# Altium PCB biolab_rev2.PcbDoc
Units mil, origin at the board's own origin, x right, y up, seen from the top; angles counter-clockwise.
Board outline 5981.63 x 5578.37 mil, 2 copper layers (Top Layer, Bottom Layer); 39 components, 34 nets, 157 pads, 4 vias.
Unrouted connection lines stored in the file: 109.
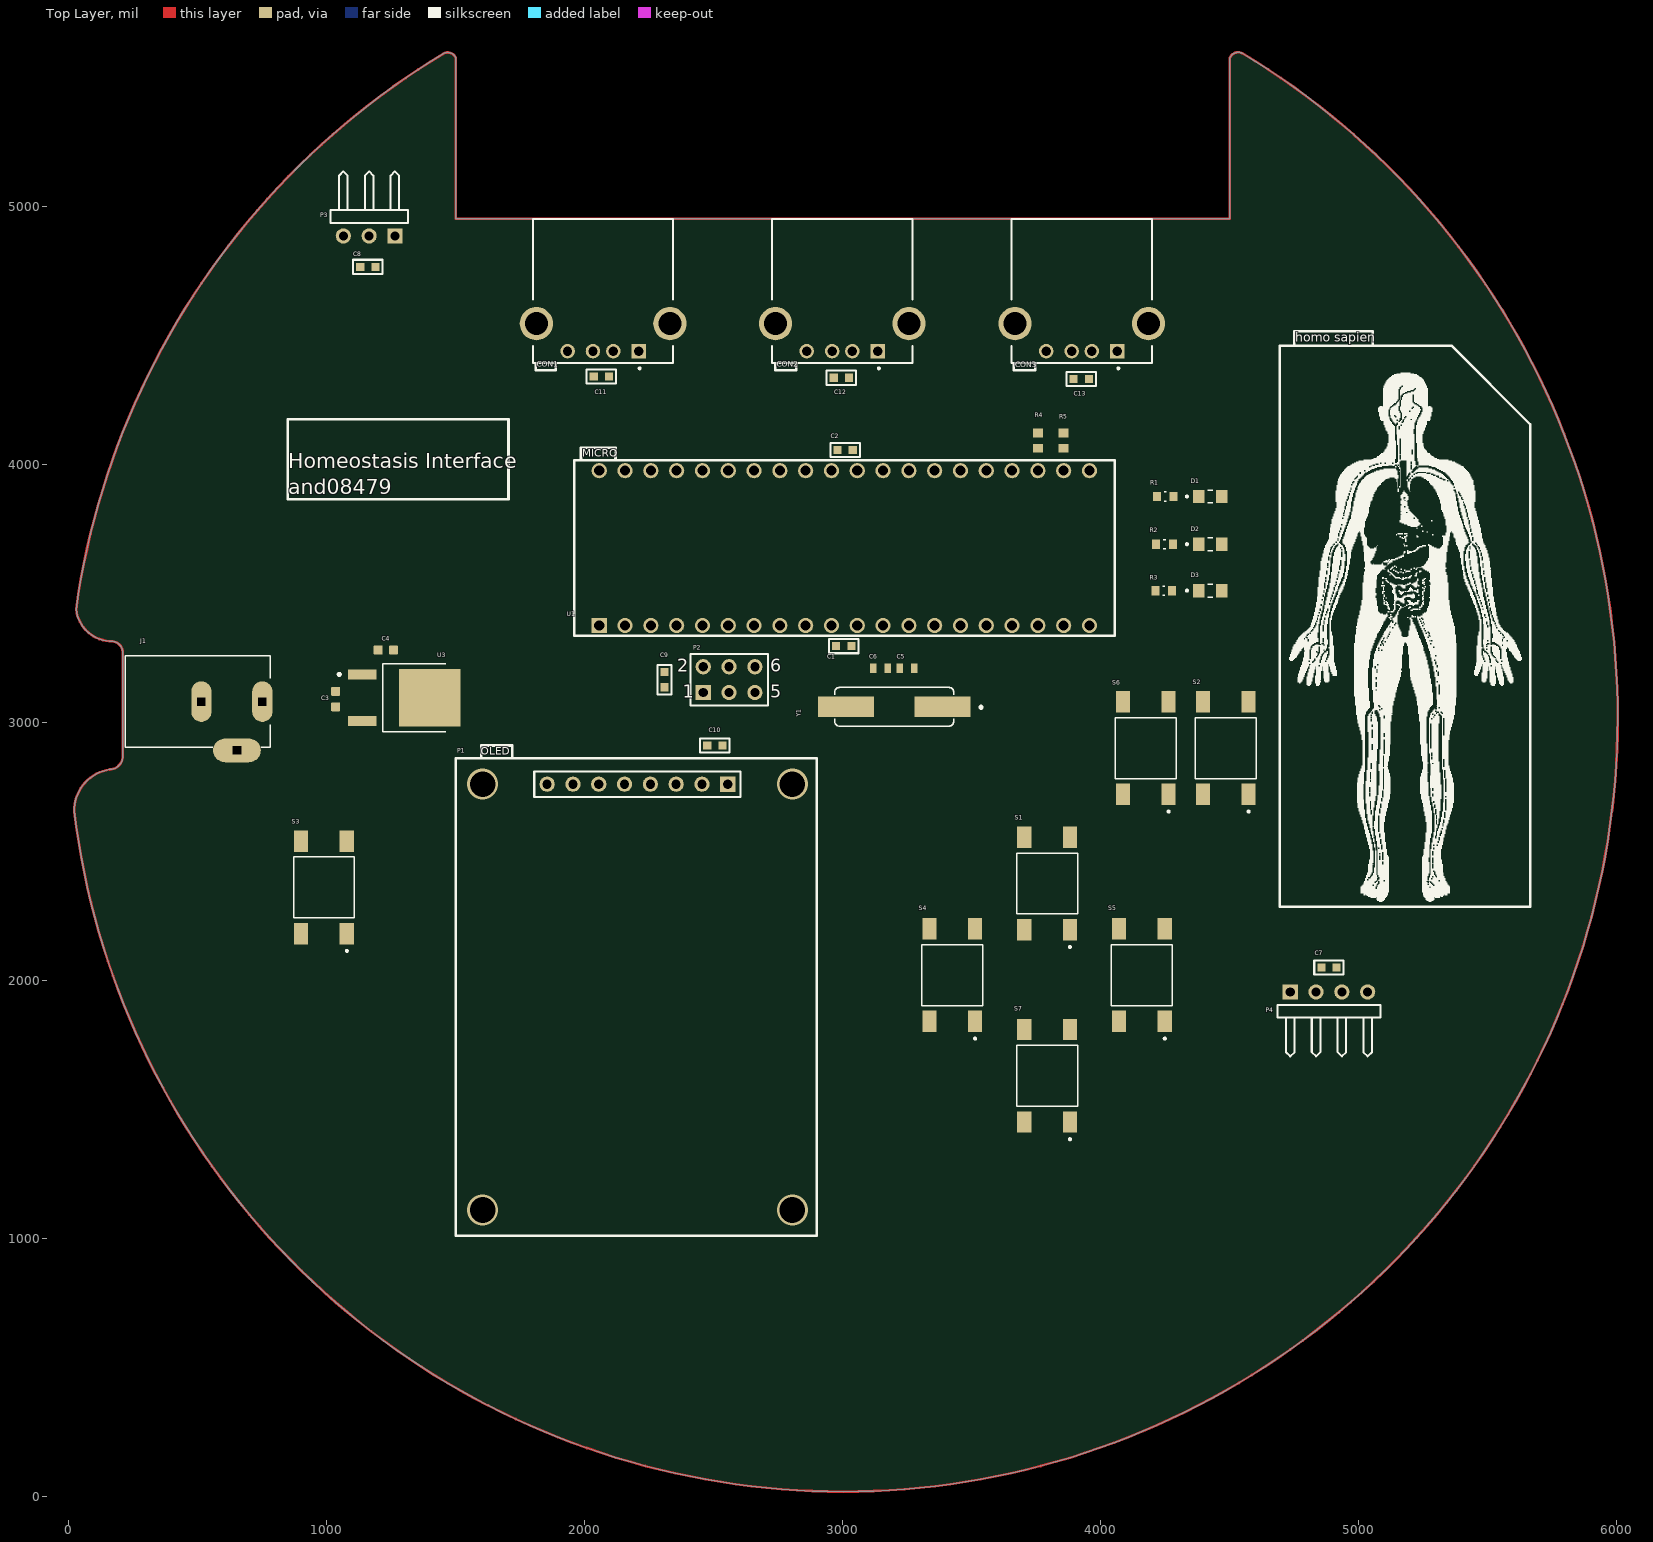
[diagram p0: Top Layer view]
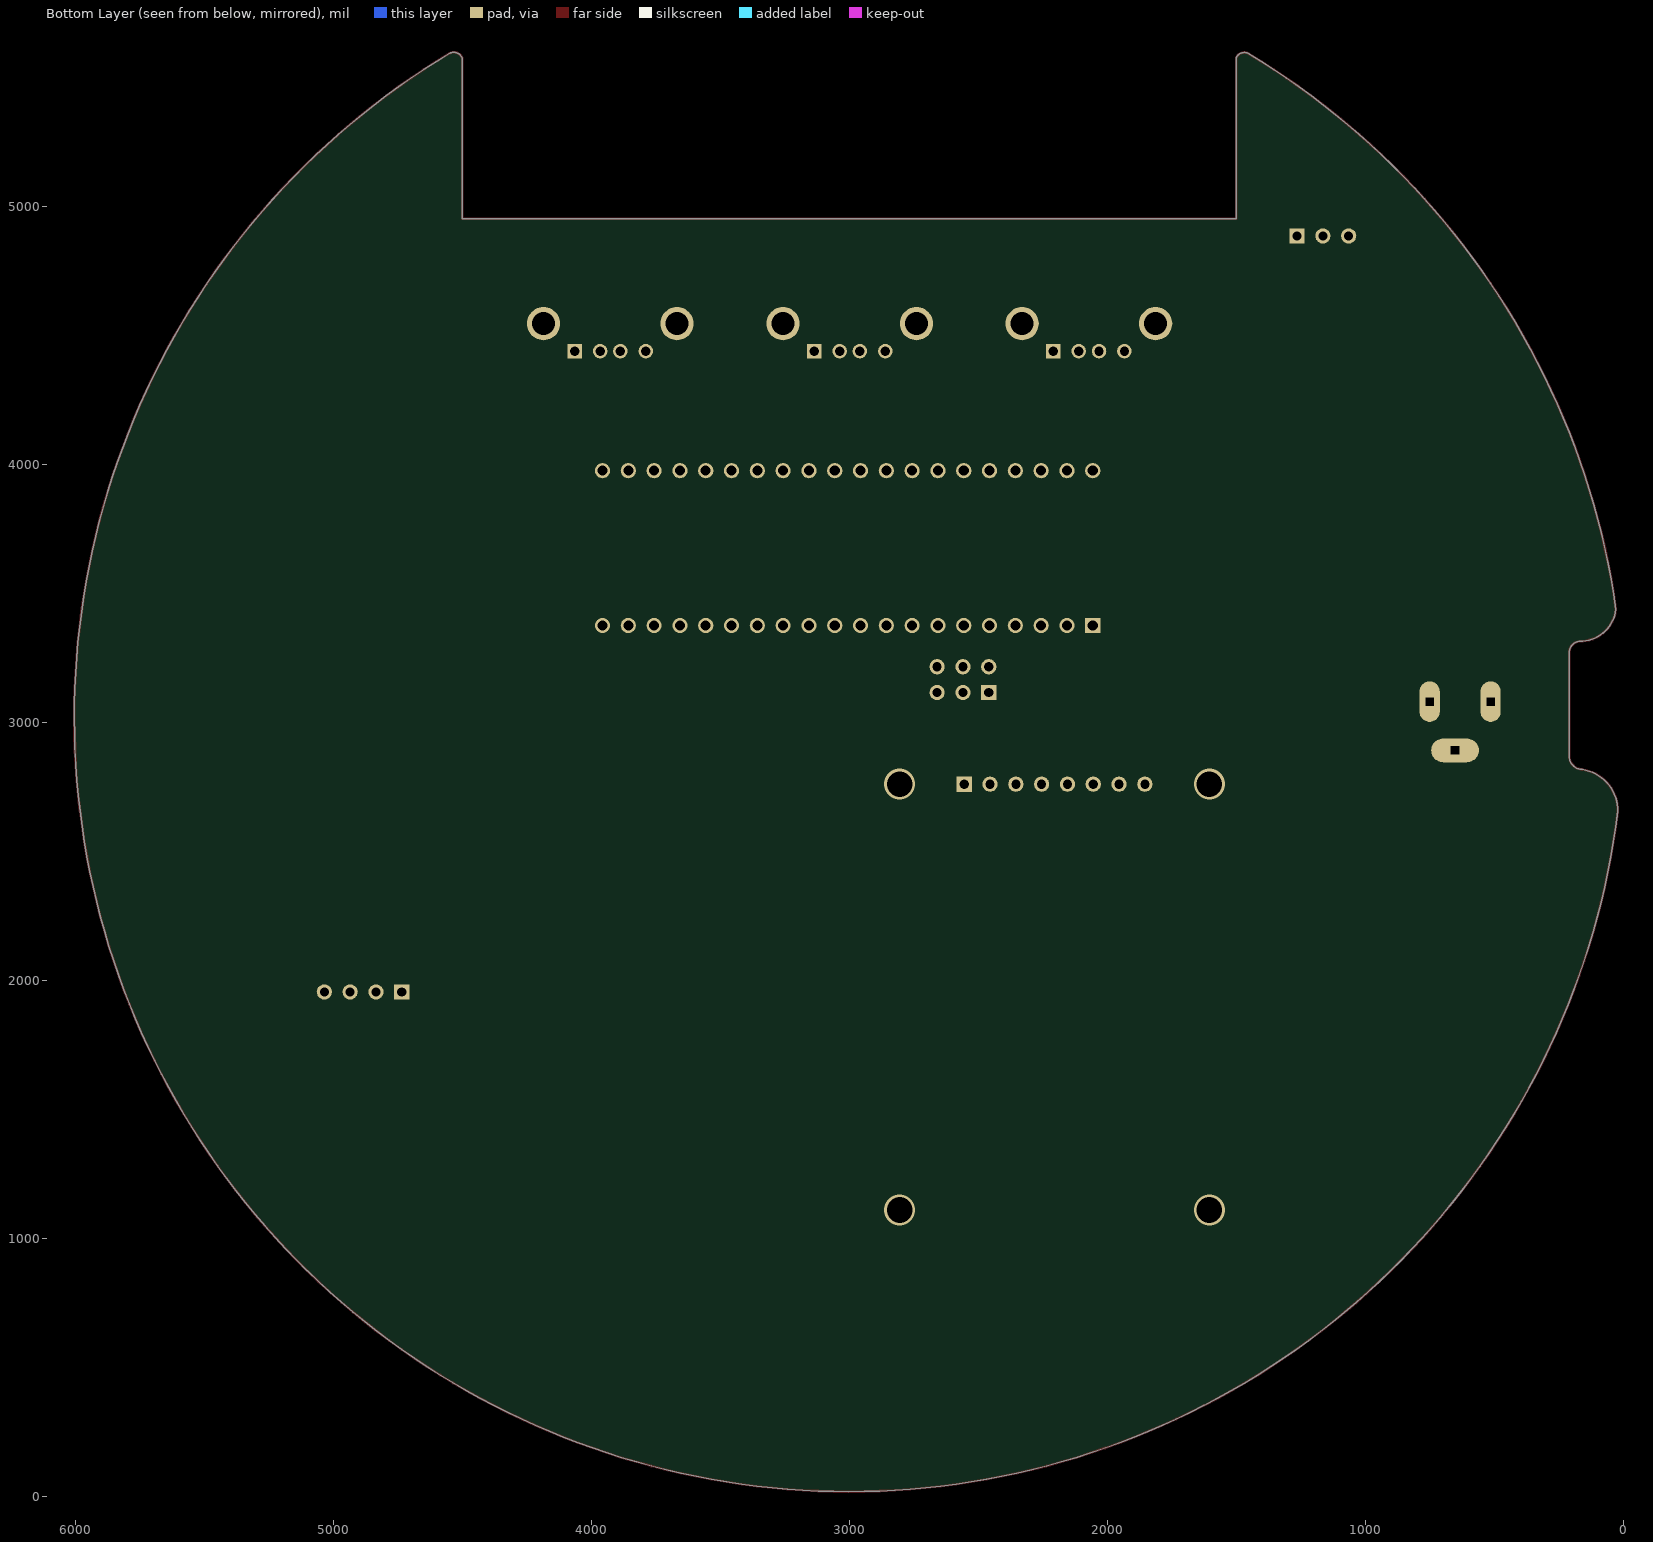
[diagram p1: Bottom Layer view, seen from below]

## Layer stack, top to bottom
Top Solder: solder mask 0.4, Solder Resist, Dk 3.5
Top Layer: signal copper 1.4
Dielectric 1: dielectric 12.6, FR-4, Dk 4.8
Bottom Layer: signal copper 1.4
Bottom Solder: solder mask 0.4, Solder Resist, Dk 3.5

## Board outline
22.38,2654.16 cw(c182.92,2658.15) 159.7,2817.06 ccw(c158.38,2868.68) 210,2870 210,3265 ccw(c165.42,3269.43) 169.85,3314.02 cw(c168.37,3454.15) 29.21,3437.52 cw(c3001.87,3019.74) 1455.91,5592.91 1455.79,5593.11 cw(c1469.31,5561.48) 1500.94,5575 1500.94,4950.94 4500.94,4950.94 4500.94,5575 cw(c4533.81,5560.72) 4548.09,5593.6 cw(c3001.87,3020.26) 3001.87,18.13 cw(c3001.87,3020)

## Design rules (kind name [scope] priority, off if disabled: settings)
Clearance [All] p1: gap=10 ignorepadtopadclearanceinfootprint=FALSE except(0: Arc-Hole Track-Hole SMDPad-Hole THPad-Hole Via-Hole Fill-Hole Poly-Hole Region-Hole Text-Hole)
PolygonConnect [All] p1: connectstyle=Relief reliefconductorwidth=10 reliefentries=4 polygonreliefangle="90 Angle" airgapwidth=10
RoutingVias [All] p1: holewidth=28 width=50 viastyle="Through Hole" minholewidth=28 minwidth=50 maxholewidth=28 maxwidth=50
SolderMaskExpansion [All] p1: expansion=4 istentingtop=FALSE
Width [All] p1: maxlimit=10 minlimit=10 preferedwidth=10
30 further rules are at their usual default settings.

## Components (designator, comment, footprint, x,y, rotation, side; value= is the part's Value field where it differs from the comment)
C1 "100nF" WCAP-CSST_885382206004 3004.53,3295 r180 top
C2 "100nF" WCAP-CSST_885382206004 3010,4055 r0 top
C3 "10uF" C0603 1035,3090 r0 top
C4 "10uF" C0603 1230,3280 r90 top
C5 "20pF" CAPC1608X85N 3250,3210 r0 top
C6 "20pF" CAPC1608X85N 3147,3210 r180 top
C7 "100nF" WCAP-CSST_885382206004 4885,2050 r0 top
C8 "100nF" WCAP-CSST_885382206004 1160,4765 r180 top
C9 "100nF" WCAP-CSST_885382206004 2310,3165 r90 top
C10 "100nF" WCAP-CSST_885382206004 2505,2910 r180 top
C11 "100nF" WCAP-CSST_885382206004 2065,4340 r0 top
C12 "100nF" WCAP-CSST_885382206004 2995,4335 r0 top
C13 "100nF" WCAP-CSST_885382206004 3925,4330 r0 top
CON1 "USB" GCT_USB1130-15-A_REVA 2071.87,4545 r180 top
CON2 "USB" GCT_USB1130-15-A_REVA 2998.63,4545 r180 top
CON3 "USB" GCT_USB1130-15-A_REVA 3926.87,4545 r180 top
D1 "POWER" LED_7012X1 4425,3875 r0 top
D2 "INIT" LED_7012X1 4425,3690 r0 top
D3 "RUN" LED_7012X1 4425,3510 r0 top
J1 "PWR IN" NINIGI_DC-005 652.8,3080 r0 top
P1 "OLED" HDR1X8 2555,2760 r180 top locked
P2 "ISP" HDR2X3 2460,3115 r0 top
P3 "STRIP" HDR1X3H 1265,4885 r180 top
P4 "I2C" HDR1X4H 4735,1955 r0 top
R1 "200" RESC1608X55N 4250,3875 r0 top
R2 "200" RESC1608X55N 4247.72,3690 r0 top
R3 "200" RESC1608X55N 4245,3510 r0 top
R4 "1k5" RESC1508X55N 3757.99,4091.35 r90 top
R5 "1k5" RESC1508X55N 3856.77,4091.35 r90 top
S1 "UP" SW_TL3301AF160QG 3792.5,2375 r90 top
S2 "SELECT" SW_TL3301AF160QG 4485,2900 r90 top
S3 "RESET" SW_TL3301AF160QG 990,2360 r90 top
S4 "LEFT" SW_TL3301AF160QG 3425,2020 r90 top
S5 "RIGHT" SW_TL3301AF160QG 4160,2020 r90 top
S6 "BACK" SW_TL3301AF160QG 4175,2900 r90 top
S7 "DOWN" SW_TL3301AF160QG 3792.5,1630 r90 top
U1 "ATMEGA644PV" DIP254P1524X483-40 3956.87,3975 r90 top
U3 "NCP1117DT50G" DPAK229P990X238-4N 1301.18,3095 r270 top
Y1 "16 MHz" XTAL_FOXSDLF/160-20 3200,3060 r180 top

## Footprints (in the part's own frame and the unit in brackets; to place one, negate y for a bottom-side part, rotate by r counter-clockwise, add the part's x,y. Pads: shape width x height; smd on the part's side, far side on the other; paste and mask are expansions set on the pad)
C0603 [mil]
  rrect25% 35x35 smd: 1(0,30) 2(0,-30)
  body extent -16,-31 16,31, height 35
CAPC1608X85N [mil]
  rect 26x37 smd: 1(-28,0) 2(28,0)
DIP254P1524X483-40 [mil]
  rect 59x59 hole 39: 1(-600,1900)
  round 59 hole 39: 2(-600,1800) 3(-600,1700) 4(-600,1600) 5(-600,1500) 6(-600,1400) 7(-600,1300) 8(-600,1200) 9(-600,1100) 10(-600,1000) 11(-600,900) 12(-600,800) 13(-600,700) 14(-600,600) 15(-600,500) 16(-600,400) 17(-600,300) 18(-600,200) 19(-600,100) 20(-600,0) 21(0,0) 22(0,100) 23(0,200) 24(0,300) 25(0,400) 26(0,500) 27(0,600) 28(0,700) 29(0,800) 30(0,900) 31(0,1000) 32(0,1100) 33(0,1200) 34(0,1300) 35(0,1400) 36(0,1500) 37(0,1600) 38(0,1700) 39(0,1800) 40(0,1900)
  body extent -625,-80 25,1980, height 190
DPAK229P990X238-4N [mm]
  rect 0.97x2.83 smd: 1(-2.29,-4.14) 3(2.29,-4.14)
  rect 5.63x6.09 smd paste-4: 2(0,2.51)
  silkscreen extent -3.37,-6.5 3.37,4.09, body extent -3.25,-4.83 3.25,5.08, height 2.39
GCT_USB1130-15-A_REVA [mm]
  rect 1.428x1.428 hole 0.92: 1(-3.5,2.71)
  round 1.428 hole 0.92: 2(-1,2.71) 3(1,2.71) 4(3.5,2.71)
  round 3.276 hole 2.26: S1(-6.57,0) S2(6.57,0)
  silkscreen extent -6.9,-10.28 6.9,4.5, body extent -7.8,-10.28 7.8,3.88, height 6.99
HDR1X3H [mm] "Connector; Header; 3 Position; Right Angle"
  rect 1.5x1.5 hole 0.9: 1(0,0)
  round 1.5 hole 0.9: 2(2.54,0) 3(5.08,0)
  silkscreen extent -1.27,-6.35 6.35,-1.27
HDR1X4H [mm] "Connector; Header; 4 Position; Right Angle"
  rect 1.5x1.5 hole 0.9: 1(0,0)
  round 1.5 hole 0.9: 2(2.54,0) 3(5.08,0) 4(7.62,0)
  silkscreen extent -1.27,-6.35 8.89,-1.27
HDR1X8 [mm] "Connector; Header; 8 Position"
  rect 1.5x1.5 hole 0.9: 1(0,0)
  round 1.5 hole 0.9: 2(2.54,0) 3(5.08,0) 4(7.62,0) 5(10.16,0) 6(12.7,0) 7(15.24,0) 8(17.78,0)
  silkscreen extent -1.27,-1.27 19.05,1.27
HDR2X3 [mm] "Connector; Header; 3x2 Position"
  rect 1.5x1.5 hole 0.9: 1(0,0)
  round 1.5 hole 0.9: 2(0,2.54) 3(2.54,0) 4(2.54,2.54) 5(5.08,0) 6(5.08,2.54)
  silkscreen extent -1.27,-1.27 6.35,3.81
LED_7012X1 [mm]
  rect 1.15x1.3 smd: A(1.125,0) C(-1.125,0)
  silkscreen extent -2.4,-0.63 0.23,0.63, body extent -1,-0.62 1,0.62, height 0.73
NINIGI_DC-005 [mm]
  oval 4.7x2.35 hole 0.8 square: 2(0,-4.8)
  oval 2x4 hole 0.8 square: 3(-3.5,0) 4(2.5,0)
  silkscreen extent -11,-4.5 3.3,4.5, body extent -11.25,-5.02 3.05,4.38, height 11
RESC1508X55N [mm]
  rect 0.85x0.98 smd: 1(-0.75,0) 2(0.75,0)
  body extent -0.77,-0.43 0.77,0.43, height 0.55
RESC1608X55N [mm]
  rect 0.79x0.93 smd: 1(-0.82,0) 2(0.82,0)
  silkscreen extent -0.11,-0.45 0.11,0.45, body extent -0.8,-0.4 0.8,0.4, height 0.55
SW_TL3301AF160QG [mm]
  rect 2.1x1.4 smd: 1(-4.55,-2.25) 2(4.55,-2.25) 3(-4.55,2.25) 4(4.55,2.25)
  silkscreen extent -6.35,-3 3,3, body extent -5,-3 5,3, height 5.1
WCAP-CSST_885382206004 [mm]
  rect 0.8x0.8 smd: 1(-0.75,0) 2(0.75,0)
  silkscreen extent -1.45,-0.7 1.45,0.7, body extent -0.78,-0.4 0.82,0.4, height 0.4
XTAL_FOXSDLF/160-20 [mm]
  rect 5.5x2 smd: 1(-4.75,0) 2(4.75,0)
  silkscreen extent -8.6,-1.9 5.85,1.9

## Part data
C1 C2 C7 C8 C9 C10 C11 C12 C13: library part 885382206004, "<b> WCAP-CSST Soft Termination MLCC <br> <br> <br><b>Characteristics </b><br> </b><br>Multilayer ceramic chip capacitors <br>Recommended soldering: Reflow <br>Operating temperature: -55 Â°C up to +125 Â°C <br>Capacitance range: 220 pF - 2.2 ÂµF <br>Rated voltage: 16 V(DC) up to 2 kV(DC) <br>Size: 0603, 0805, 1206 and 1210 <br>High absorbtion of mechanical stress   <br> <br> <br><b>Applications </b><br> <br>Application with high mechanical stress <br>Power supply <br>Lighting  <br> <br> <br><a href=\"https://katalog.we-online.de/media/images/v2/Family_WCAP-CSST.jpg\" title=\"Enlarge picture\"> <img src=\"https://katalog.we-online.de/media/images/v2/Family_WCAP-CSST.jpg\" width=\"320\"></a><p> Details see: <a href=\"https://katalog.we-online.de/en/pbs/WCAP-CSST#vs_ct:1\">https://katalog.we-online.de/en/pbs/WCAP-CSST#vs_ct:1<br> <br></a><p>Created By Yingchun,Shan 2018-11-14 <br><br>20178(C) Wurth Elektronik", Package=None, Availability=Unavailable, MF="{'manufacturer': u'Wurth Electronics Inc'}", MP=885382206004, Price=None
C3 C4: library part CERAMIC-10UF-10V-10%-X5R(0603), "302010103", Package=None, Availability=Unavailable, MF="{'manufacturer': u'Yageo'}", MP=CERAMIC-10UF-10V-10%-X5R(0603), Price=None
C5 C6: library part C0603C200J5GACTU, "CAPACITOR, 0603", Package=None, Availability=Unavailable, MF="{'manufacturer': u'KEMET'}", MP=C0603C200J5GACTU, Price=None
CON1 CON2 CON3: library part USB1130-15-A_REVA, Package=None, Availability=Unavailable, MF="{'manufacturer': u'Global Connector Technology'}", MP=USB1130-15-A_REVA, Price=None
D1 D2 D3: library part 7012X1, "Red LED Indication - Discrete 1.7V 0805 (2012 Metric)", Package=None, Availability=Unavailable, MF="{'manufacturer': u'Visual'}", MP=7012X1, Price=None
J1: library part DC-005, "DC Jack", Package=None, Availability=Unavailable, MF="{'manufacturer': u'Best Inc.'}", MP=DC-005, Price=None
P1: library part "Header 8", "Header, 8-Pin", LatestRevisionDate=17-Jul-2002, LatestRevisionNote="Re-released for DXP Platform.", Publisher="Altium Limited"
P2: library part "Header 3X2", "Header, 3-Pin, Dual row", LatestRevisionDate=17-Jul-2002, LatestRevisionNote="Re-released for DXP Platform.", Publisher="Altium Limited"
P3: library part "Header 3H", "Header, 3-Pin, Right Angle", LatestRevisionDate=17-Jul-2002, LatestRevisionNote="Re-released for DXP Platform.", Publisher="Altium Limited"
P4: library part "Header 4H", "Header, 4-Pin, Right Angle", LatestRevisionDate=17-Jul-2002, LatestRevisionNote="Re-released for DXP Platform.", Publisher="Altium Limited"
R1 R2 R3: library part SR0603JR-07200RL, Package=None, Availability=Unavailable, MF="{'manufacturer': u'Yageo'}", MP=SR0603JR-07200RL, Price=None
R4 R5: library part TNPW06031K50BXEN, Package=None, Availability=Unavailable, MF="{'manufacturer': u'Vishay'}", MP=TNPW06031K50BXEN, Price=None
S1 S2 S3 S4 S5 S6 S7: library part TL3301AF160QG, Package=None, Availability=Unavailable, MF="{'manufacturer': u'E-Switch'}", MP=TL3301AF160QG, Price=None
U1: library part ATMEGA644PV-10PU, "8-bit Microcontroller with In-System Programmable  Flash", Package=None, Availability=Unavailable, MF="{'manufacturer': u'Microchip Technology'}", MP=ATMEGA644PV-10PU, Price=None
U3: Package=None, Availability=Unavailable, MF="{'manufacturer': u'ON Semiconductor'}", MP=NCP1117DT50G, Price=None
Y1: library part FOXSDLF/160-20, "Crystal 16MHz 20pF 2-Pin HC-49/SD", Package=None, Availability=Unavailable, MF="{'manufacturer': u'Fox Electronics'}", MP=FOXSDLF/160-20, Price=None

## Via types
v1: diameter 120, hole 100, Top Layer to Bottom Layer, 4 vias

## Nets (pads, with @x,y where several pads share a name; then routed paths per layer and width w, separated by ;. In a path a pad name is that pad's centre, name@x,y a point inside that pad or via, vN(x,y) a via of type N, cw(c..) or ccw(c..) an arc to the next point about the centre after c; other vN are vias at no path point)
+3: P1.3 R4.2 R5.2
+5: C1.2 C2.2 C4.2 C7.2 C8.2 C9.2 C10.2 C11.2 C12.2 C13.2 CON1.1 CON2.1 CON3.1 D1.A D2.A D3.A P1.2 P2.2 P3.3 P4.4 U1.10 U1.30 U1.32 U3.2
+9: C3.2 J1.4 U3.3
BACK: S6.1 S6.2 U1.26
CON1A: CON1.2 U1.40
CON1B: CON1.3 U1.39
CON2A: CON2.2 U1.38
CON2B: CON2.3 U1.37
CON3A: CON3.2 U1.36
CON3B: CON3.3 U1.35
DOWN: S7.1 S7.2 U1.15
GND: C1.1 C2.1 C3.1 C4.1 C5.1 C6.1 C7.1 C8.1 C9.1 C10.1 C11.1 C12.1 C13.1 CON1.4 CON2.4 CON3.4 J1.2 J1.3 P1.1 P2.6 P3.1 P4.1 S1.3 S1.4 S2.3 S2.4 S3.3 S3.4 S4.3 S4.4 S5.3 S5.4 S6.3 S6.4 S7.3 S7.4 U1.11 U1.31 U3.1
INIT_LED: R2.1 U1.19
LEFT: S4.1 S4.2 U1.16
MISO: P2.1 U1.7
MOSI: P1.8 P2.4 U1.6
NetD1_C: D1.C R1.2
NetD2_C: D2.C R2.2
NetD3_C: D3.C R3.2
nRST: P2.5 S3.1 S3.2 U1.9
OLED_CS: P1.4 U1.5
OLED_DC: P1.6 U1.4
OLED_RST: P1.5 U1.3
PWR_LED: R1.1 U1.21
RIGHT: S5.1 S5.2 U1.17
RUN_LED: R3.1 U1.20
SCK: P1.7 P2.3 U1.8
SCL: P4.2 R5.1 U1.22
SDA: P4.3 R4.1 U1.23
SEL: S2.1 S2.2 U1.27
STRIP_SIG: P3.2 U1.1
UP: S1.1 S1.2 U1.14
XTAL_IN: C5.2 U1.13 Y1.1
XTAL_OUT: C6.2 U1.12 Y1.2
pads on no net: CON1.S1 CON1.S2 CON2.S1 CON2.S2 CON3.S1 CON3.S2 U1.2 U1.18 U1.24 U1.25 U1.28 U1.29 U1.33 U1.34
copper on no net: | length 20170.8
  Top Layer w10: 1455.79,5593.11 cw(c1469.31,5561.48) 1500.94,5575 1500.94,4950.94 4500.94,4950.94 4500.94,5575 cw(c4533.81,5560.72) 4548.09,5593.6 cw(c3001.87,3020.26) 3001.87,18.13 cw(c3001.87,3020) 22.38,2654.16 cw(c182.92,2658.15) 159.7,2817.06 ccw(c158.38,2868.68) 210,2870 210,3265 ccw(c165.42,3269.43) 169.85,3314.02 cw(c168.37,3454.15) 29.21,3437.52 cw(c3001.87,3019.74) 1455.91,5592.91
  other v1: 1605,1110 2805,1110 1605,2760 2805,2760

## Silkscreen, mask and mechanical layers (free items; w line width, h text height)
Top Overlay:
  drawing of 186 lines, arcs and shapes, not listed
  text "homo sapien" at 4754.61,4463.05 h60
  text "MICRO" at 1990.14,4019.44 h50
  text "Homeostasis Interface / and08479" at 852.5,3865 h100
  text "OLED" at 1597.47,2864.83 h50

## Text inside footprints (layer, text, board x,y; h text height)
CON1: Mechanical 13 "PCB EDGE" at 1778.57,4938.7 h32 r180
CON2: Mechanical 13 "PCB EDGE" at 2705.32,4938.7 h32 r180
CON3: Mechanical 13 "PCB EDGE" at 3633.57,4938.7 h32 r180
P2: Top Overlay "6" at 2720,3195 h50; Top Overlay "5" at 2720,3095 h50; Top Overlay "2" at 2360,3195 h50; Top Overlay "1" at 2380,3095 h50